# Altium PCB PCB_bad_traced.PcbDoc (part 1 of 5)
Units mm, origin at the board's own origin, x right, y up, seen from the top; angles counter-clockwise.
Board outline 425 x 295 mm, 2 copper layers (Top Layer, Bottom Layer); 484 components, 419 nets, 1569 pads, 847 vias.
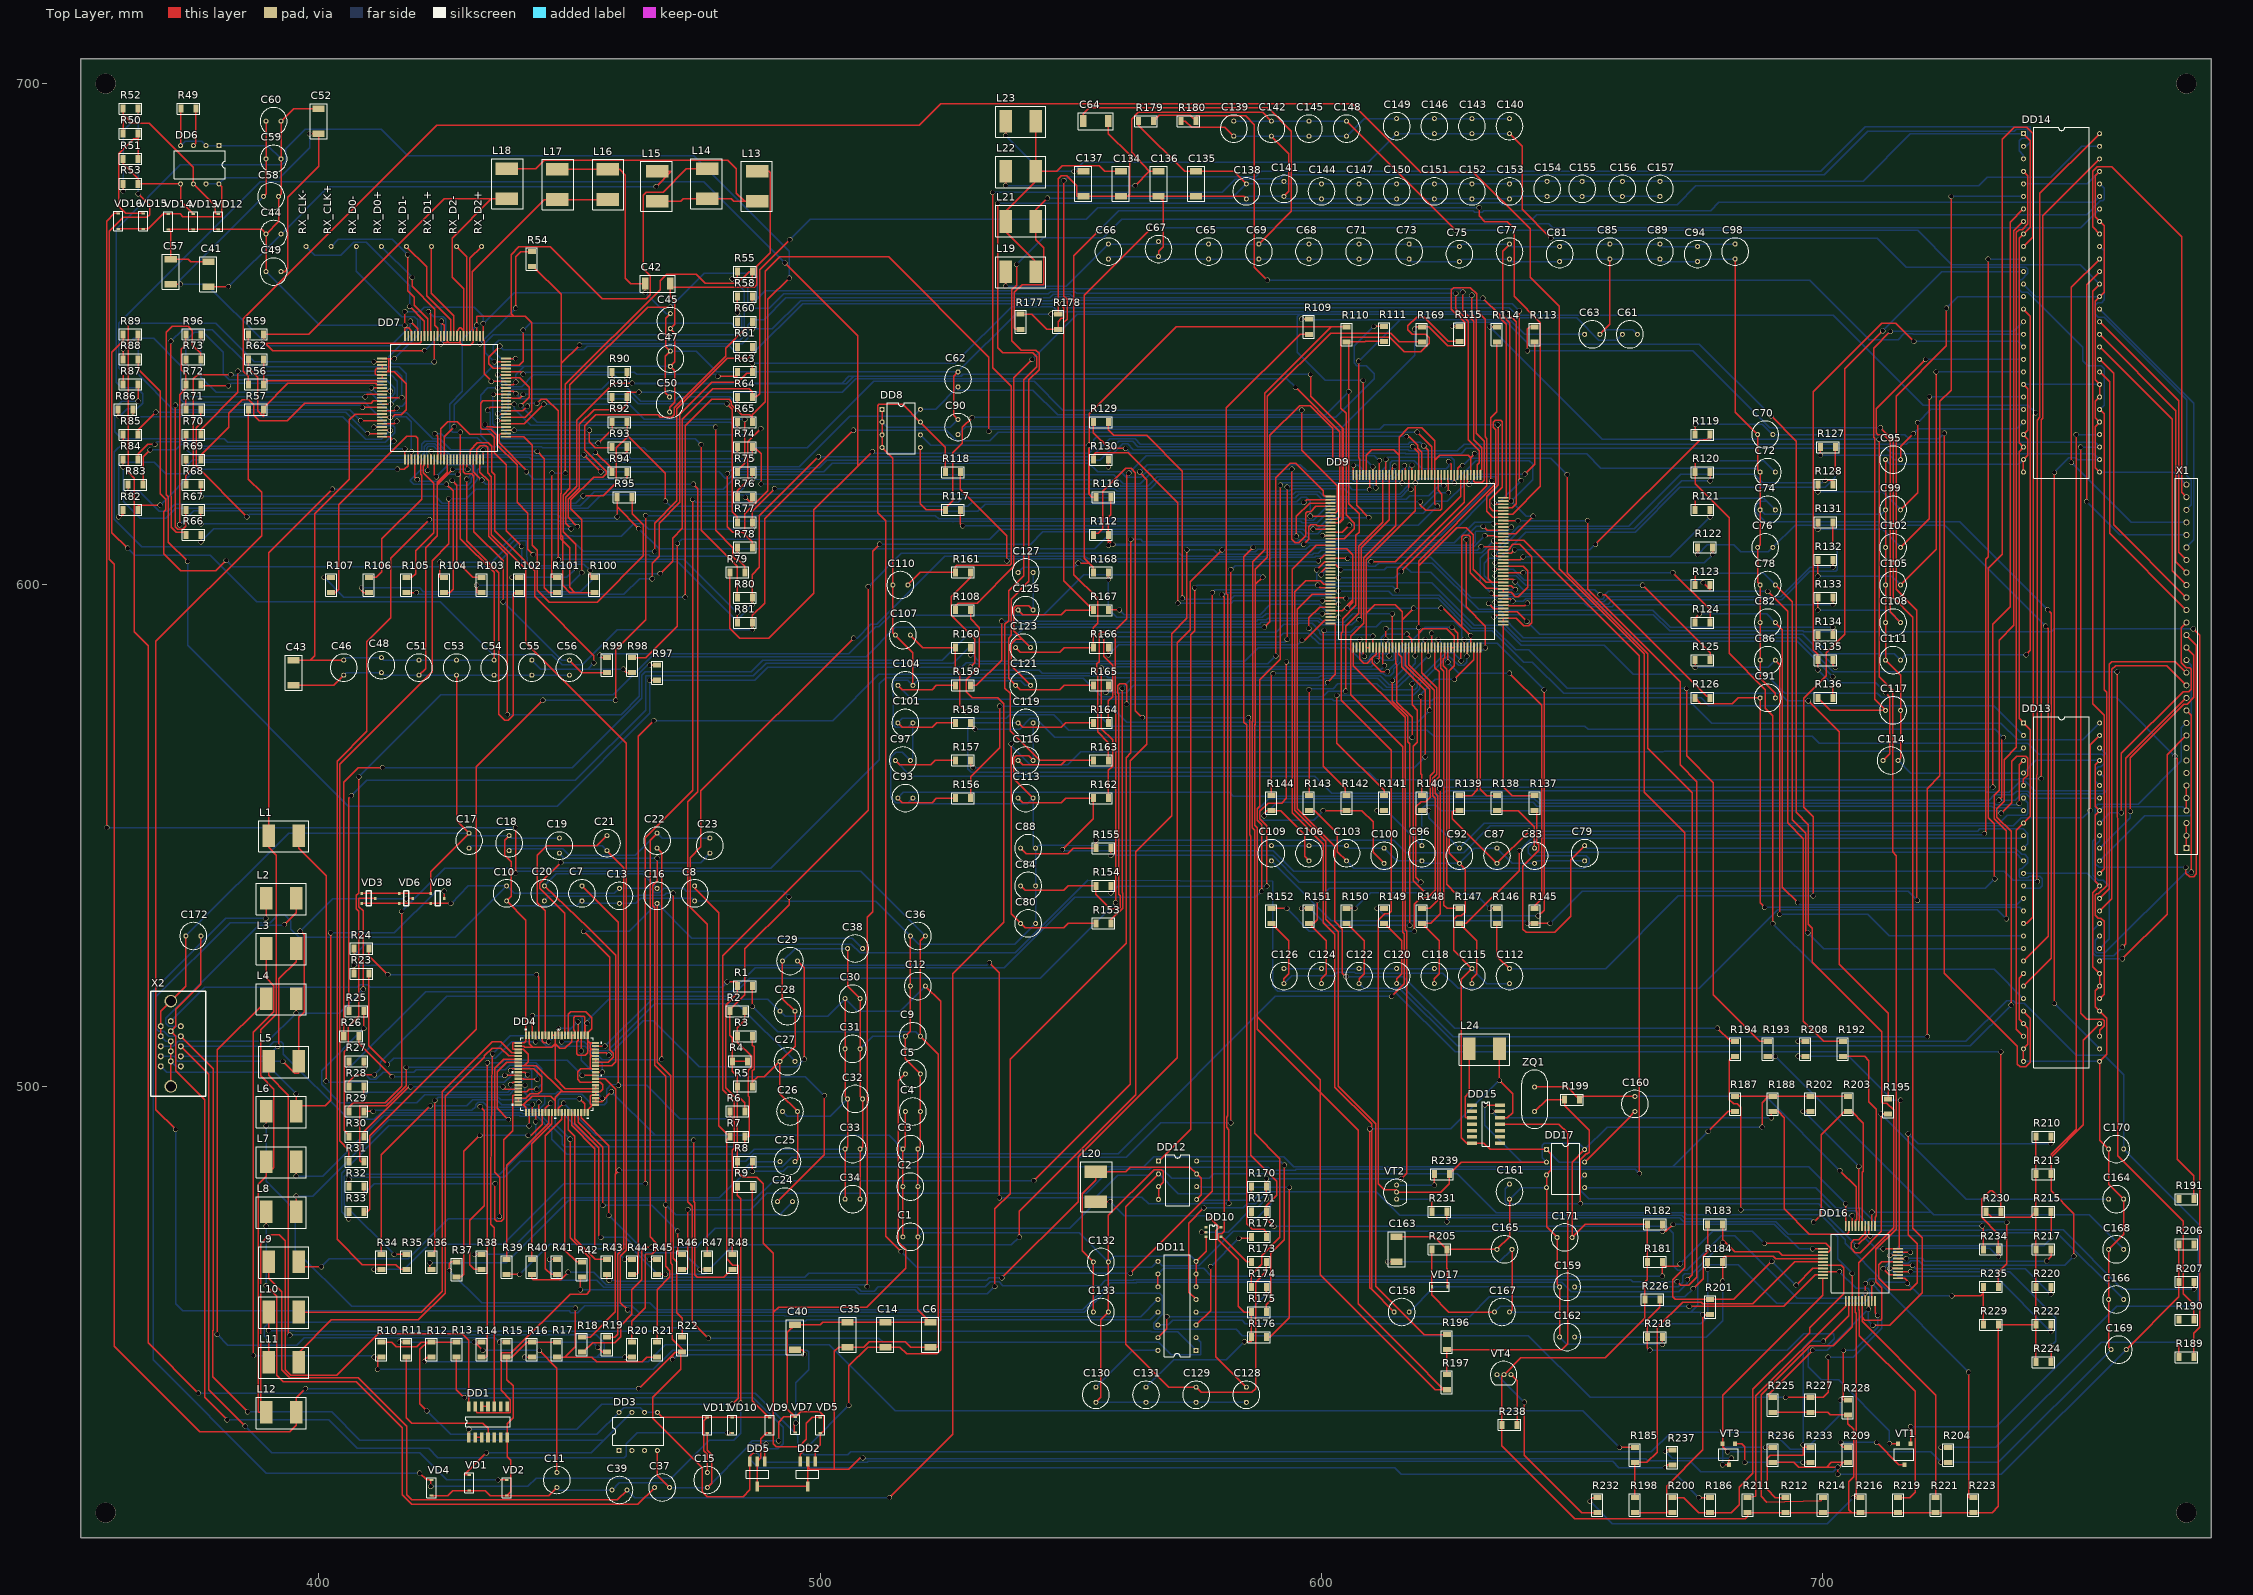
[diagram p0: Top Layer view]
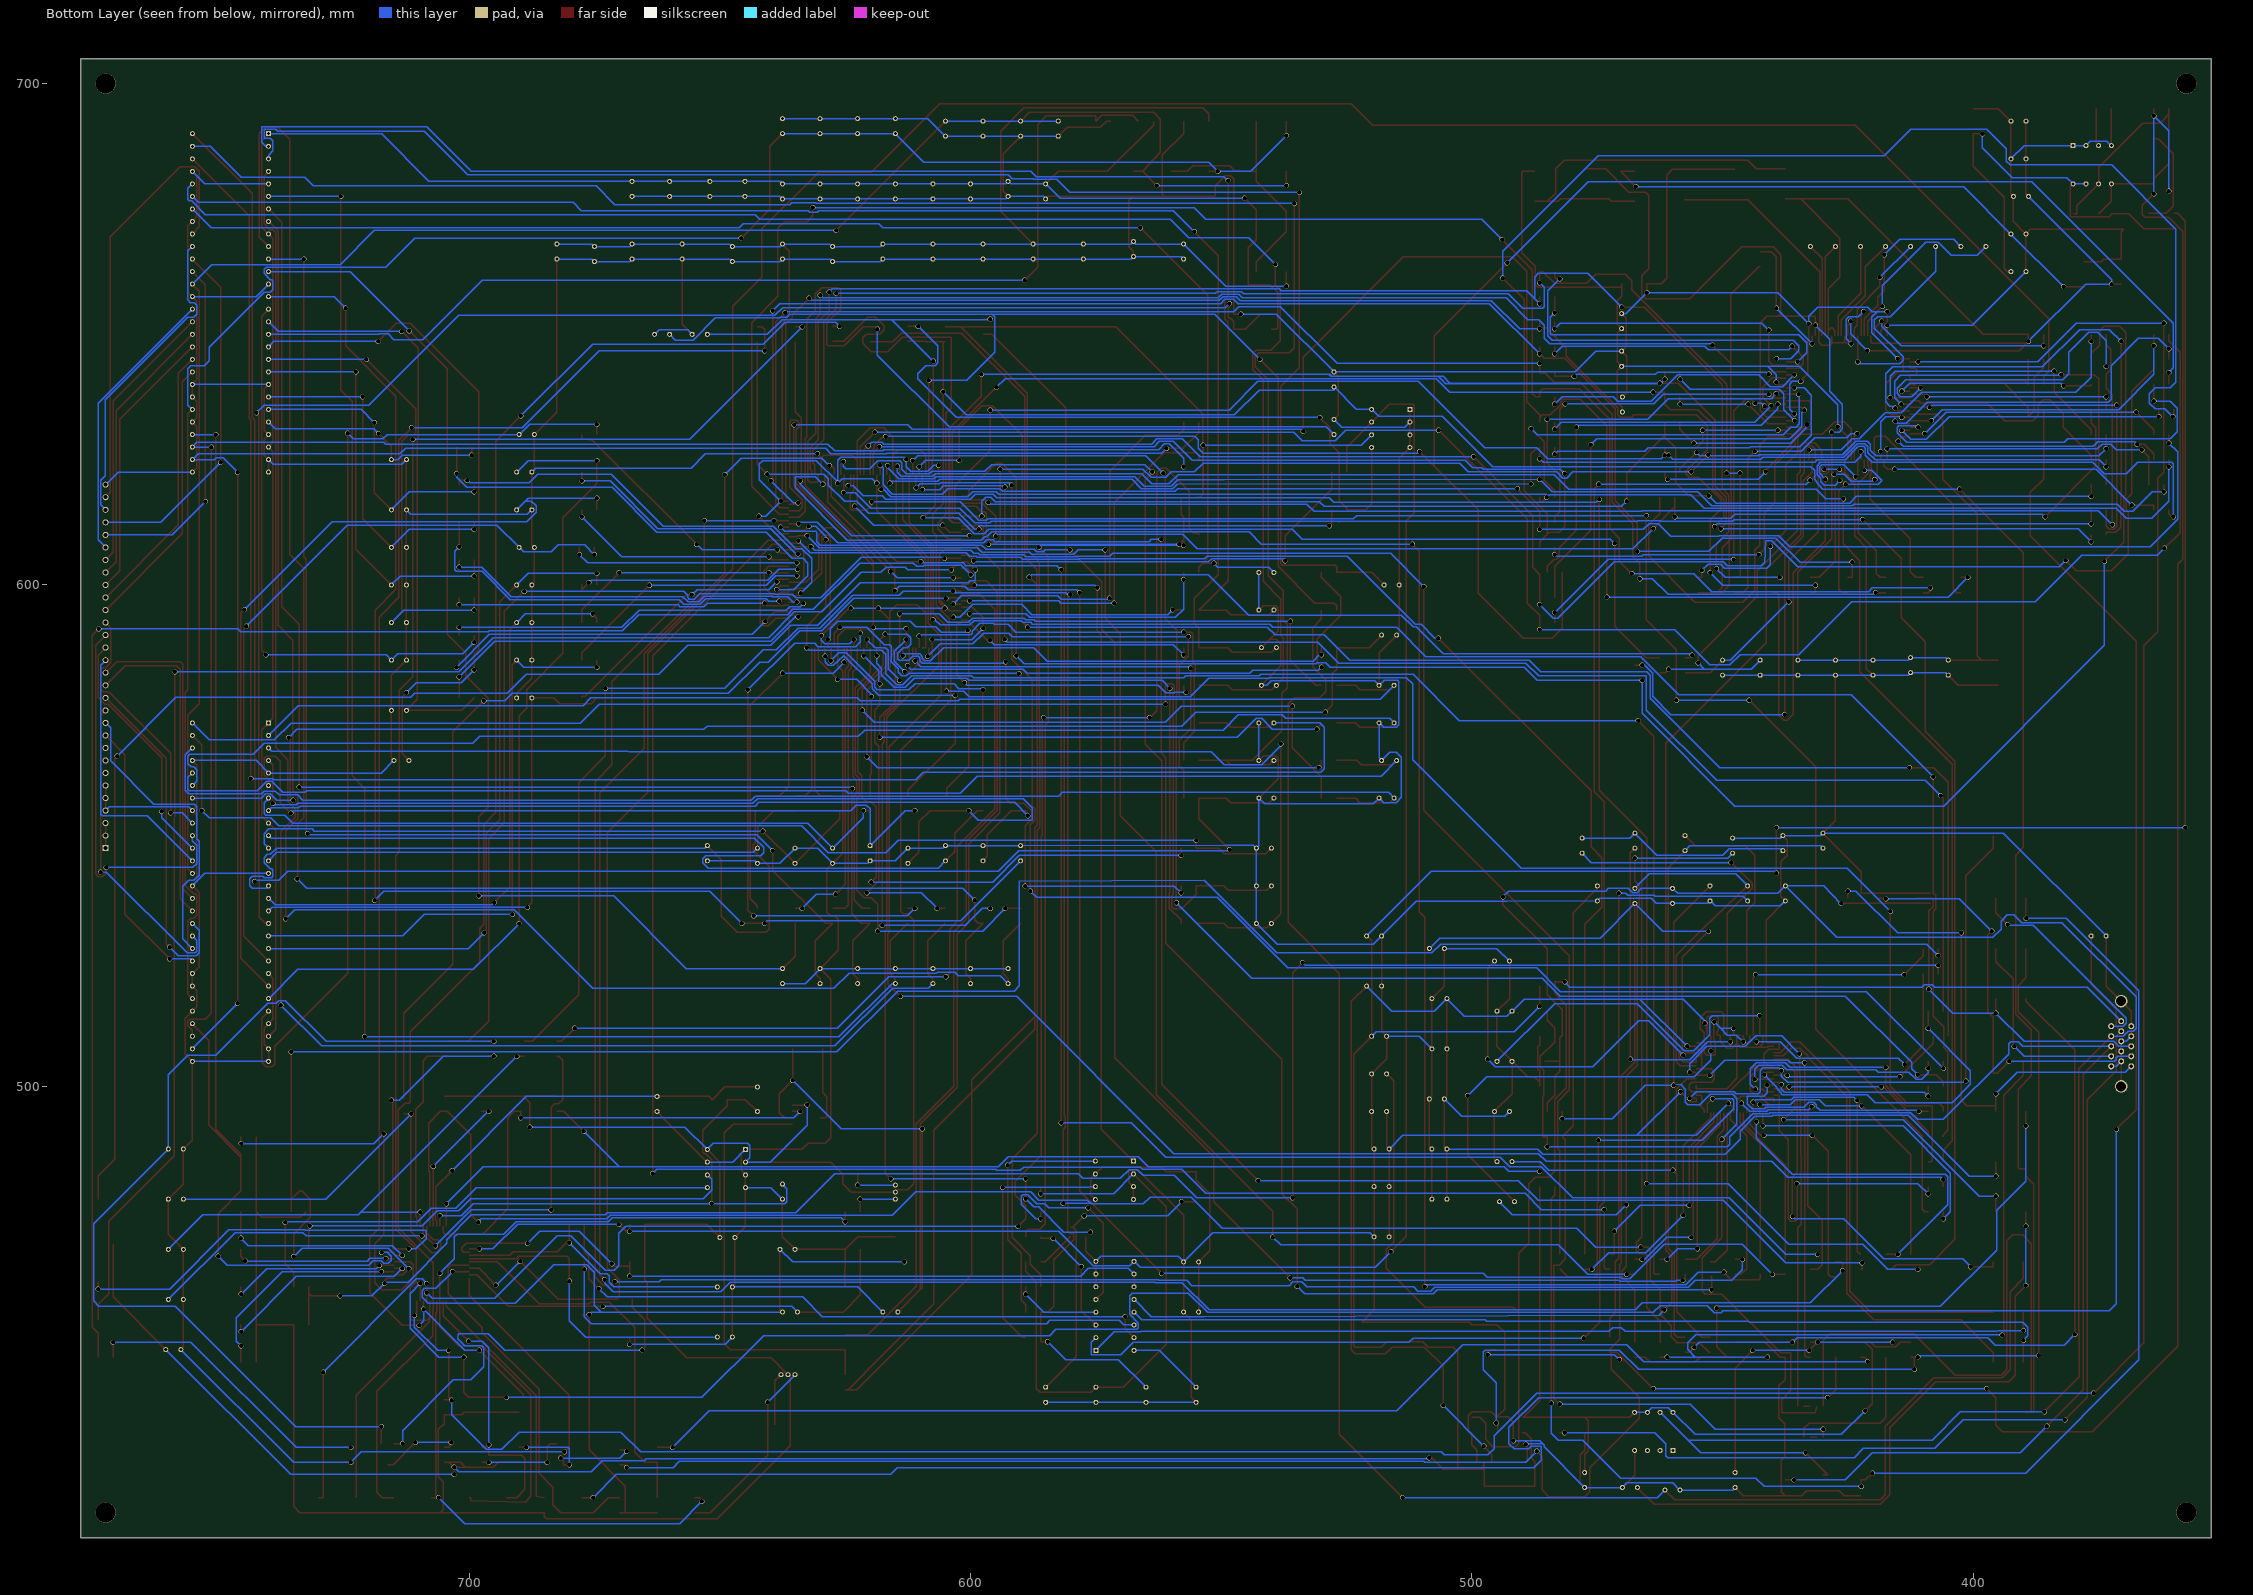
[diagram p1: Bottom Layer view, seen from below]

## Layer stack, top to bottom
Top Solder: solder mask 0.0102, Solder Resist, Dk 3.5
Top Layer: signal copper 0.0356
Dielectric 1: dielectric 0.32, FR-4, Dk 4.8
Bottom Layer: signal copper 0.0356
Bottom Solder: solder mask 0.0102, Solder Resist, Dk 3.5

## Board outline
352.5,410 777.5,410 777.5,705 352.5,705

## Design rules (kind name [scope] priority, off if disabled: settings)
Clearance [All] p1: gap=0.254 ignorepadtopadclearanceinfootprint=FALSE except(0: Arc-Hole Track-Hole SMDPad-Hole THPad-Hole Via-Hole Fill-Hole Poly-Hole Region-Hole Text-Hole; 0.2: Arc-SMDPad Track-SMDPad SMDPad-SMDPad)
PolygonConnect [All] p1: connectstyle=Relief reliefconductorwidth=0.254 reliefentries=4 polygonreliefangle="90 Angle" airgapwidth=0.254
RoutingVias [All] p1: holewidth=0.9 width=1 viastyle="Through Hole" minholewidth=0.6 minwidth=1 maxholewidth=1 maxwidth=1.2
SolderMaskExpansion [All] p1: expansion=0.102
Width [All] p1: maxlimit=0.3 minlimit=0.25 preferedwidth=0.25 minimp=50.000000 maximp=50.000000 favimp=50.000000
30 further rules are at their usual default settings.

## Classes and differential pairs
component class 31: C1 C2 C3 C4 C5 C6 C7 C8 C9 C10 C11 C12 C13 C14 C15 C16 C17 C18 C19 C20 C21 C22 C23 C24 C25 C26 C27 C28 C29 C30 C31 C32 C33 C34 C35 C36 C37 C38 C39 C40 DD1 DD2 DD3 DD4 DD5 L1 L2 L3 L4 L5 L6 L7 L8 L9 L10 L11 L12 R1 R2 R3 R4 R5 R6 R7 R8 R9 R10 R11 R12 R13 R14 R15 R16 R17 R18 R19 R20 R21 R22 R23 R24 R25 R26 R27 R28 R29 R30 R31 R32 R33 R34 R35 R36 R37 R38 R39 R40 R41 R42 R43 R44 R45 R46 R47 R48 VD1 VD2 VD3 VD4 VD5 VD6 VD7 VD8 VD9 VD10 VD11
component class 32: C41 C42 C43 C44 C45 C46 C47 C48 C49 C50 C51 C52 C53 C54 C55 C56 C57 C58 C59 C60 DD6 DD7 L13 L14 L15 L16 L17 L18 R49 R50 R51 R52 R53 R54 R55 R56 R57 R58 R59 R60 R61 R62 R63 R64 R65 R66 R67 R68 R69 R70 R71 R72 R73 R74 R75 R76 R77 R78 R79 R80 R81 R82 R83 R84 R85 R86 R87 R88 R89 R90 R91 R92 R93 R94 R95 R96 R97 R98 R99 R100 R101 R102 R103 R104 R105 R106 R107 RX_CLK+ RX_CLK- RX_D0+ RX_D0- RX_D1+ RX_D1- RX_D2+ RX_D2- VD12 VD13 VD14 VD15 VD16
component class 33: C61 C62 C63 C64 C65 C66 C67 C68 C69 C70 C71 C72 C73 C74 C75 C76 C77 C78 C79 C80 C81 C82 C83 C84 C85 C86 C87 C88 C89 C90 C91 C92 C93 C94 C95 C96 C97 C98 C99 C100 C101 C102 C103 C104 C105 C106 C107 C108 C109 C110 C111 C112 C113 C114 C115 C116 C117 C118 C119 C120 C121 C122 C123 C124 C125 C126 C127 DD8 DD9 L19 R108 R109 R110 R111 R112 R113 R114 R115 R116 R117 R118 R119 R120 R121 R122 R123 R124 R125 R126 R127 R128 R129 R130 R131 R132 R133 R134 R135 R136 R137 R138 R139 R140 R141 R142 R143 R144 R145 R146 R147 R148 R149 R150 R151 R152 R153 R154 R155 R156 R157 R158 R159 R160 R161 R162 R163 R164 R165 R166 R167 R168 R169
component class 34: C128 C129 C130 C131 C132 C133 DD10 DD11 DD12 L20 R170 R171 R172 R173 R174 R175 R176
component class 35: C134 C135 C136 C137 C138 C139 C140 C141 C142 C143 C144 C145 C146 C147 C148 C149 C150 C151 C152 C153 C154 C155 C156 C157 DD13 DD14 L21 L22 L23 R177 R178 R179 R180 X1
component class 36: C158 C159 C160 C161 C162 C163 C164 C165 C166 C167 C168 C169 C170 C171 DD15 DD16 DD17 L24 R181 R182 R183 R184 R185 R186 R187 R188 R189 R190 R191 R192 R193 R194 R195 R196 R197 R198 R199 R200 R201 R202 R203 R204 R205 R206 R207 R208 R209 R210 R211 R212 R213 R214 R215 R216 R217 R218 R219 R220 R221 R222 R223 R224 R225 R226 R227 R228 R229 R230 R231 R232 R233 R234 R235 R236 R237 R238 R239 VD17 VT1 VT2 VT3 VT4 ZQ1
component class VGA: C172 X2
net class B_INA[0..7]: B_INA0 B_INA1 B_INA2 B_INA3 B_INA4 B_INA5 B_INA6 B_INA7
net class B_INB[0..7]: B_INB0 B_INB1 B_INB2 B_INB3 B_INB4 B_INB5 B_INB6 B_INB7
net class G_INA[0..7]: G_INA0 G_INA1 G_INA2 G_INA3 G_INA4 G_INA5 G_INA6 G_INA7
net class G_INB[0..7]: G_INB0 G_INB1 G_INB2 G_INB3 G_INB4 G_INB5 G_INB6 G_INB7
net class R_INA[0..7]: R_INA0 R_INA1 R_INA2 R_INA3 R_INA4 R_INA5 R_INA6 R_INA7
net class R_INB[0..7]: R_INB0 R_INB1 R_INB2 R_INB3 R_INB4 R_INB5 R_INB6 R_INB7

## Components (designator, comment, footprint, x,y, rotation, side; value= is the part's Value field where it differs from the comment)
C1 "Capacitor" cap_electro_13 518,470 r0 top
C2 "Capacitor" cap_electro_13 518,480 r0 top
C3 "Capacitor" cap_electro_13 518,487.5 r0 top
C4 "Capacitor" cap_electro_13 518.5,495 r0 top
C5 "Capacitor" cap_electro_13 518.5,502.5 r0 top
C6 "TuningCapacitor" Cap_tantal_D 522,450.5 r270 top
C7 "Capacitor" cap_electro_13 452.5,538.5 r270 top
C8 "Capacitor" cap_electro_13 475,538.5 r270 top
C9 "Capacitor" cap_electro_13 518.5,510 r180 top
C10 "Capacitor" cap_electro_13 437.5,538.5 r270 top
C11 "Capacitor" cap_electro_13 447.5,421.5 r270 top
C12 "Capacitor" cap_electro_13 519.5,520 r180 top
C13 "Capacitor" cap_electro_13 460,538 r270 top
C14 "TuningCapacitor" Cap_tantal_D 513,450.5 r270 top
C15 "Capacitor" cap_electro_13 477.5,421.5 r270 top
C16 "Capacitor" cap_electro_13 467.5,538 r270 top
C17 "Capacitor" cap_electro_13 430,549 r90 top
C18 "Capacitor" cap_electro_13 438,548.5 r90 top
C19 "Capacitor" cap_electro_13 448,548 r90 top
C20 "Capacitor" cap_electro_13 445,538.5 r270 top
C21 "Capacitor" cap_electro_13 457.5,548.5 r270 top
C22 "Capacitor" cap_electro_13 467.5,549 r90 top
C23 "Capacitor" cap_electro_13 478,548 r90 top
C24 "Capacitor" cap_electro_13 493,477 r0 top
C25 "Capacitor" cap_electro_13 493.5,485 r180 top
C26 "Capacitor" cap_electro_13 494,495 r0 top
C27 "Capacitor" cap_electro_13 493.5,505 r0 top
C28 "Capacitor" cap_electro_13 493.5,515 r0 top
C29 "Capacitor" cap_electro_13 494,525 r0 top
C30 "Capacitor" cap_electro_13 506.5,517.5 r0 top
C31 "Capacitor" cap_electro_13 506.5,507.5 r0 top
C32 "Capacitor" cap_electro_13 507,497.5 r0 top
C33 "Capacitor" cap_electro_13 506.5,487.5 r0 top
C34 "Capacitor" cap_electro_13 506.5,477.5 r0 top
C35 "TuningCapacitor" Cap_tantal_D 505.5,450.5 r270 top
C36 "Capacitor" cap_electro_13 519.5,530 r180 top
C37 "Capacitor" cap_electro_13 468.5,420 r0 top
C38 "Capacitor" cap_electro_13 507,527.5 r180 top
C39 "Capacitor" cap_electro_13 460,419.5 r180 top
C40 "TuningCapacitor" Cap_tantal_D 495,450 r270 top
C41 "TuningCapacitor" Cap_tantal_D 378,662 r270 top
C42 "TuningCapacitor" Cap_tantal_D 467.62,660.12 r0 top
C43 "TuningCapacitor" Cap_tantal_D 395,582.5 r90 top
C44 "Capacitor" cap_electro_13 391,670 r0 top
C45 "Capacitor" cap_electro_13 470.12,652.62 r270 top
C46 "Capacitor" cap_electro_13 405,583.5 r90 top
C47 "Capacitor" cap_electro_13 470.12,645.12 r270 top
C48 "Capacitor" cap_electro_13 412.5,584 r90 top
C49 "Capacitor" cap_electro_13 391,662.5 r0 top
C50 "Capacitor" cap_electro_13 470,636 r270 top
C51 "Capacitor" cap_electro_13 420,583.5 r90 top
C52 "TuningCapacitor" Cap_tantal_D 400,692.5 r270 top
C53 "Capacitor" cap_electro_13 427.5,583.5 r90 top
C54 "Capacitor" cap_electro_13 435,583.5 r90 top
C55 "Capacitor" cap_electro_13 442.5,583.5 r90 top
C56 "Capacitor" cap_electro_13 450,583.5 r90 top
C57 "TuningCapacitor" Cap_tantal_D 370.5,662.5 r270 top
C58 "Capacitor" cap_electro_13 390.5,677.5 r180 top
C59 "Capacitor" cap_electro_13 391,685 r180 top
C60 "Capacitor" cap_electro_13 391,692.5 r180 top
C61 "Capacitor" cap_electro_13 661.5,650 r180 top
C62 "Capacitor" cap_electro_13 527.5,641 r270 top
C63 "Capacitor" cap_electro_13 654,650 r180 top
C64 "TuningCapacitor" Cap_tantal_D 555,692.5 r180 top
C65 "Capacitor" cap_electro_13 577.5,666.5 r90 top
C66 "Capacitor" cap_electro_13 557.5,666.5 r90 top
C67 "Capacitor" cap_electro_13 567.5,667 r90 top
C68 "Capacitor" cap_electro_13 597.5,666.5 r90 top
C69 "Capacitor" cap_electro_13 587.5,666.5 r90 top
C70 "Capacitor" cap_electro_13 688.5,630 r0 top
C71 "Capacitor" cap_electro_13 607.5,666.5 r90 top
C72 "Capacitor" cap_electro_13 689,622.5 r0 top
C73 "Capacitor" cap_electro_13 617.5,666.5 r90 top
C74 "Capacitor" cap_electro_13 689,615 r0 top
C75 "Capacitor" cap_electro_13 627.5,666 r90 top
C76 "Capacitor" cap_electro_13 688.5,607.5 r0 top
C77 "Capacitor" cap_electro_13 637.5,666.5 r90 top
C78 "Capacitor" cap_electro_13 689,600 r0 top
C79 "Capacitor" cap_electro_13 652.5,546.5 r90 top
C80 "Capacitor" cap_electro_13 541.5,532.5 r180 top
C81 "Capacitor" cap_electro_13 647.5,666 r90 top
C82 "Capacitor" cap_electro_13 689,592.5 r0 top
C83 "Capacitor" cap_electro_13 642.5,546 r90 top
C84 "Capacitor" cap_electro_13 541.5,540 r180 top
C85 "Capacitor" cap_electro_13 657.5,666.5 r90 top
C86 "Capacitor" cap_electro_13 689,585 r0 top
C87 "Capacitor" cap_electro_13 635,546 r270 top
C88 "Capacitor" cap_electro_13 541.5,547.5 r180 top
C89 "Capacitor" cap_electro_13 667.5,666.5 r90 top
C90 "Capacitor" cap_electro_13 527.5,631.5 r270 top
C91 "Capacitor" cap_electro_13 689,577.5 r180 top
C92 "Capacitor" cap_electro_13 627.5,546 r90 top
C93 "Capacitor" cap_electro_13 517,557.5 r180 top
C94 "Capacitor" cap_electro_13 675,666 r90 top
C95 "Capacitor" cap_electro_13 714,625 r0 top
C96 "Capacitor" cap_electro_13 620,546.5 r90 top
C97 "Capacitor" cap_electro_13 516.5,565 r180 top
C98 "Capacitor" cap_electro_13 682.5,666.5 r90 top
C99 "Capacitor" cap_electro_13 714,615 r0 top
C100 "Capacitor" cap_electro_13 612.5,546 r270 top
C101 "Capacitor" cap_electro_13 517,572.5 r180 top
C102 "Capacitor" cap_electro_13 714,607.5 r0 top
C103 "Capacitor" cap_electro_13 605,546.5 r270 top
C104 "Capacitor" cap_electro_13 517,580 r180 top
C105 "Capacitor" cap_electro_13 714,600 r0 top
C106 "Capacitor" cap_electro_13 597.5,546.5 r270 top
C107 "Capacitor" cap_electro_13 516.5,590 r0 top
C108 "Capacitor" cap_electro_13 714,592.5 r0 top
C109 "Capacitor" cap_electro_13 590,546.5 r270 top
C110 "Capacitor" cap_electro_13 516,600 r0 top
C111 "Capacitor" cap_electro_13 714,585 r0 top
C112 "Capacitor" cap_electro_13 637.5,522 r90 top
C113 "Capacitor" cap_electro_13 541,557.5 r180 top
C114 "Capacitor" cap_electro_13 713.5,565 r180 top
C115 "Capacitor" cap_electro_13 630,522 r270 top
C116 "Capacitor" cap_electro_13 541,565 r180 top
C117 "Capacitor" cap_electro_13 714,575 r180 top
C118 "Capacitor" cap_electro_13 622.5,522 r270 top
C119 "Capacitor" cap_electro_13 541,572.5 r180 top
C120 "Capacitor" cap_electro_13 615,522 r270 top
C121 "Capacitor" cap_electro_13 540.5,580 r180 top
C122 "Capacitor" cap_electro_13 607.5,522 r270 top
C123 "Capacitor" cap_electro_13 540.5,587.5 r180 top
C124 "Capacitor" cap_electro_13 600,522 r270 top
C125 "Capacitor" cap_electro_13 541,595 r180 top
C126 "Capacitor" cap_electro_13 592.5,522 r270 top
C127 "Capacitor" cap_electro_13 541,602.5 r180 top
C128 "Capacitor" cap_electro_13 585,438.5 r270 top
C129 "Capacitor" cap_electro_13 575,438.5 r270 top
C130 "Capacitor" cap_electro_13 555,438.5 r90 top
C131 "Capacitor" cap_electro_13 565,438.5 r270 top
C132 "Capacitor" cap_electro_13 556,465 r0 top
C133 "Capacitor" cap_electro_13 556,455 r0 top
C134 "TuningCapacitor" Cap_tantal_D 560,680 r90 top
C135 "TuningCapacitor" Cap_tantal_D 575,680 r90 top
C136 "TuningCapacitor" Cap_tantal_D 567.5,680 r90 top
C137 "TuningCapacitor" Cap_tantal_D 552.5,680 r90 top
C138 "Capacitor" cap_electro_13 585,678.5 r90 top
C139 "Capacitor" cap_electro_13 582.5,691 r90 top
C140 "Capacitor" cap_electro_13 637.5,691.5 r270 top
C141 "Capacitor" cap_electro_13 592.5,679 r90 top
C142 "Capacitor" cap_electro_13 590,691 r90 top
C143 "Capacitor" cap_electro_13 630,691.5 r270 top
C144 "Capacitor" cap_electro_13 600,678.5 r90 top
C145 "Capacitor" cap_electro_13 597.5,691 r90 top
C146 "Capacitor" cap_electro_13 622.5,691.5 r270 top
C147 "Capacitor" cap_electro_13 607.5,678.5 r90 top
C148 "Capacitor" cap_electro_13 605,691 r90 top
C149 "Capacitor" cap_electro_13 615,691.5 r270 top
C150 "Capacitor" cap_electro_13 615,678.5 r90 top
C151 "Capacitor" cap_electro_13 622.5,678.5 r90 top
C152 "Capacitor" cap_electro_13 630,678.5 r90 top
C153 "Capacitor" cap_electro_13 637.5,678.5 r90 top
C154 "Capacitor" cap_electro_13 645,679 r90 top
C155 "Capacitor" cap_electro_13 652,679 r90 top
C156 "Capacitor" cap_electro_13 660,679 r90 top
C157 "Capacitor" cap_electro_13 667.5,679 r90 top
C158 "Capacitor" cap_electro_13 616,455 r0 top
C159 "Capacitor" cap_electro_13 649,460 r0 top
C160 "Capacitor" cap_electro_13 662.5,496.5 r270 top
C161 "Capacitor" cap_electro_13 637.5,479 r270 top
C162 "Capacitor" cap_electro_13 649,450 r0 top
C163 "TuningCapacitor" Cap_tantal_D 615,467.5 r270 top
C164 "Capacitor" cap_electro_13 758.5,477.5 r0 top
C165 "Capacitor" cap_electro_13 636.5,467.5 r0 top
C166 "Capacitor" cap_electro_13 758.5,457.5 r180 top
C167 "Capacitor" cap_electro_13 636,455 r0 top
C168 "Capacitor" cap_electro_13 758.5,467.5 r180 top
C169 "Capacitor" cap_electro_13 759,447.5 r180 top
C170 "Capacitor" cap_electro_13 758.5,487.5 r180 top
C171 "Capacitor" cap_electro_13 648.5,469.88 r180 top
C172 "Capacitor" cap_electro_13 375,530 r0 top
DD1 "74LVX14" 74LVX14(SO-14) 429.96,430.085 r90 top
DD2 "AIC1732" AIC1732(SOT-89) 497.5,422.5 r270 top
DD3 "24C21" 24Cxx 459.92,427.38 r90 top
DD4 "AD9883ABSTZ-140" ST_80_2_ADI 447.5,502.5 r90 top
DD5 "AIC1732" AIC1732(SOT-89) 487.5,422.5 r270 top
DD6 "24C02" 24Cxx 380.08,687.62 r270 top
DD7 "SIL151" SIL151 412.65,645.15 r180 top
DD8 "24LC08" 24Cxx 512.38,635.04 r0 top
DD9 "SD1210" SD1210 601.8,617.65 r0 top
DD10 "F14-SINGLE" 74AHC1G14(SOT25) 577,471.9 r0 top
DD11 "74LV4053" 74LV4053(SOT38-4) 575,447.34 r180 top
DD12 "AV9173-01" AV9173-01(DIP8) 567.5,485.08 r0 top
DD13 "SN75LVDS83" SN75LVDS83_v2 740,572.5 r0 top
DD14 "SN75LVDS83" SN75LVDS83_v2 740,690 r0 top
DD15 "74LCX125" 74LCX125(page12) 630,496.27 r0 top
DD16 "SM0230" SM0230 710.4,471.4 r90 top
DD17 "24LC16" 24Cxx 644.88,487.42 r0 top
L1 "Inductor" inductor 393,550 r180 top
L2 "Inductor" inductor 392.5,537.5 r180 top
L3 "Inductor" inductor 392.5,527.5 r180 top
L4 "Inductor" inductor 392.5,517.5 r180 top
L5 "Inductor" inductor 393,505 r180 top
L6 "Inductor" inductor 392.5,495 r180 top
L7 "Inductor" inductor 392.5,485 r180 top
L8 "Inductor" inductor 392.5,475 r180 top
L9 "Inductor" inductor 393,465 r180 top
L10 "Inductor" inductor 393,455 r180 top
L11 "Inductor" inductor 393,445 r180 top
L12 "Inductor" inductor 392.5,435 r180 top
L13 "Inductor" inductor 487.5,679.5 r90 top
L14 "Inductor" inductor 477.5,680 r90 top
L15 "Inductor" inductor 467.5,679.5 r90 top
L16 "Inductor" inductor 457.62,679.88 r270 top
L17 "Inductor" inductor 447.62,679.88 r270 top
L18 "Inductor" inductor 437.5,680 r270 top
L19 "Inductor" inductor 540,662.5 r180 top
L20 "Inductor" inductor 555,480 r270 top
L21 "Inductor" inductor 540,672.5 r0 top
L22 "Inductor" inductor 540,682.5 r180 top
L23 "Inductor" inductor 540,692.5 r180 top
L24 "Inductor" inductor 632.5,507.5 r180 top
R1 "Resistor" R_1206 485,520 r0 top
R2 "Resistor" R_1206 483.5,515 r180 top
R3 "Resistor" R_1206 485,510 r180 top
R4 "Resistor" R_1206 484,505 r180 top
R5 "Resistor" R_1206 485,500 r180 top
R6 "Resistor" R_1206 483.5,495 r180 top
R7 "Resistor" R_1206 483.5,490 r180 top
R8 "Resistor" R_1206 485,485 r0 top
R9 "Resistor" R_1206 485,480 r0 top
R10 "Resistor" R_1206 412.5,447.5 r90 top
R11 "Resistor" R_1206 417.5,447.5 r90 top
R12 "Resistor" R_1206 422.5,447.5 r90 top
R13 "Resistor" R_1206 427.5,447.5 r90 top
R14 "Resistor" R_1206 432.5,447.5 r270 top
R15 "Resistor" R_1206 437.5,447.5 r90 top
R16 "Resistor" R_1206 442.5,447.5 r270 top
R17 "Resistor" R_1206 447.5,447.5 r270 top
R18 "Resistor" R_1206 452.5,448.5 r90 top
R19 "Resistor" R_1206 457.5,448.5 r90 top
R20 "Resistor" R_1206 462.5,447.5 r90 top
R21 "Resistor" R_1206 467.5,447.5 r90 top
R22 "Resistor" R_1206 472.5,448.5 r90 top
R23 "Resistor" R_1206 408.5,522.5 r0 top
R24 "Resistor" R_1206 408.5,527.5 r0 top
R25 "Resistor" R_1206 407.5,515 r180 top
R26 "Resistor" R_1206 406.5,510 r180 top
R27 "Resistor" R_1206 407.5,505 r180 top
R28 "Resistor" R_1206 407.5,500 r180 top
R29 "Resistor" R_1206 407.5,495 r180 top
R30 "Resistor" R_1206 407.5,490 r180 top
R31 "Resistor" R_1206 407.5,485 r180 top
R32 "Resistor" R_1206 407.5,480 r180 top
R33 "Resistor" R_1206 407.5,475 r0 top
R34 "Resistor" R_1206 412.5,465 r270 top
R35 "Resistor" R_1206 417.5,465 r270 top
R36 "Resistor" R_1206 422.5,465 r270 top
R37 "Resistor" R_1206 427.5,463.5 r90 top
R38 "Resistor" R_1206 432.5,465 r90 top
R39 "Resistor" R_1206 437.5,464 r270 top
R40 "Resistor" R_1206 442.5,464 r270 top
R41 "Resistor" R_1206 447.5,464 r90 top
R42 "Resistor" R_1206 452.5,463.5 r270 top
R43 "Resistor" R_1206 457.5,464 r270 top
R44 "Resistor" R_1206 462.5,464 r270 top
R45 "Resistor" R_1206 467.5,464 r270 top
R46 "Resistor" R_1206 472.5,465 r270 top
R47 "Resistor" R_1206 477.5,465 r90 top
R48 "Resistor" R_1206 482.5,465 r90 top
R49 "Resistor" R_1206 374,695 r0 top
R50 "Resistor" R_1206 362.5,690 r0 top
R51 "Resistor" R_1206 362.5,685 r0 top
R52 "Resistor" R_1206 362.5,695 r180 top
R53 "Resistor" R_1206 362.5,680 r0 top
R54 "Resistor" R_1206 442.5,665 r270 top
R55 "Resistor" R_1206 485,662.5 r0 top
R56 "Resistor" R_1206 387.5,640 r180 top
R57 "Resistor" R_1206 387.5,635 r180 top
R58 "Resistor" R_1206 485,657.5 r0 top
R59 "Resistor" R_1206 387.5,650 r180 top
R60 "Resistor" R_1206 485,652.5 r0 top
R61 "Resistor" R_1206 485,647.5 r0 top
R62 "Resistor" R_1206 387.5,645 r0 top
R63 "Resistor" R_1206 485,642.5 r0 top
R64 "Resistor" R_1206 485,637.5 r0 top
R65 "Resistor" R_1206 485,632.5 r0 top
R66 "Resistor" R_1206 375,610 r0 top
R67 "Resistor" R_1206 375,615 r0 top
R68 "Resistor" R_1206 375,620 r0 top
R69 "Resistor" R_1206 375,625 r180 top
R70 "Resistor" R_1206 375,630 r180 top
R71 "Resistor" R_1206 375,635 r0 top
R72 "Resistor" R_1206 375,640 r180 top
R73 "Resistor" R_1206 375,645 r0 top
R74 "Resistor" R_1206 485,627.5 r0 top
R75 "Resistor" R_1206 485,622.5 r0 top
R76 "Resistor" R_1206 485,617.5 r0 top
R77 "Resistor" R_1206 485,612.5 r0 top
R78 "Resistor" R_1206 485,607.5 r0 top
R79 "Resistor" R_1206 483.5,602.5 r180 top
R80 "Resistor" R_1206 485,597.5 r0 top
R81 "Resistor" R_1206 485,592.5 r0 top
R82 "Resistor" R_1206 362.5,615 r180 top
R83 "Resistor" R_1206 363.5,620 r180 top
R84 "Resistor" R_1206 362.5,625 r180 top
R85 "Resistor" R_1206 362.5,630 r180 top
R86 "Resistor" R_1206 361.5,635 r180 top
R87 "Resistor" R_1206 362.5,640 r180 top
R88 "Resistor" R_1206 362.5,645 r0 top
R89 "Resistor" R_1206 362.5,650 r180 top
R90 "Resistor" R_1206 460,642.5 r0 top
R91 "Resistor" R_1206 460,637.5 r0 top
R92 "Resistor" R_1206 460,632.5 r0 top
R93 "Resistor" R_1206 460,627.5 r0 top
R94 "Resistor" R_1206 460,622.5 r180 top
R95 "Resistor" R_1206 461,617.5 r180 top
R96 "Resistor" R_1206 375,650 r180 top
R97 "Resistor" R_1206 467.5,582.5 r270 top
R98 "Resistor" R_1206 462.5,584 r90 top
R99 "Resistor" R_1206 457.5,584 r90 top
R100 "Resistor" R_1206 455,600 r270 top
R101 "Resistor" R_1206 447.5,600 r90 top
R102 "Resistor" R_1206 440,600 r90 top
R103 "Resistor" R_1206 432.5,600 r270 top
R104 "Resistor" R_1206 425,600 r90 top
R105 "Resistor" R_1206 417.5,600 r270 top
R106 "Resistor" R_1206 410,600 r270 top
R107 "Resistor" R_1206 402.5,600 r90 top
R108 "Resistor" R_1206 528.5,595 r0 top
R109 "Resistor" R_1206 597.5,651.5 r270 top
R110 "Resistor" R_1206 605,650 r90 top
R111 "Resistor" R_1206 612.5,650.08 r90 top
R112 "Resistor" R_1206 556,610 r180 top
R113 "Resistor" R_1206 642.5,650 r90 top
R114 "Resistor" R_1206 635,650 r90 top
R115 "Resistor" R_1206 627.5,650.08 r90 top
R116 "Resistor" R_1206 556.5,617.5 r180 top
R117 "Resistor" R_1206 526.5,615 r180 top
R118 "Resistor" R_1206 526.5,622.5 r180 top
R119 "Resistor" R_1206 676,630 r0 top
R120 "Resistor" R_1206 676,622.5 r0 top
R121 "Resistor" R_1206 676,615 r0 top
R122 "Resistor" R_1206 676.5,607.5 r0 top
R123 "Resistor" R_1206 676,600 r0 top
R124 "Resistor" R_1206 676,592.5 r0 top
R125 "Resistor" R_1206 676,585 r0 top
R126 "Resistor" R_1206 676,577.5 r0 top
R127 "Resistor" R_1206 701,627.5 r0 top
R128 "Resistor" R_1206 700.5,620 r0 top
R129 "Resistor" R_1206 556,632.5 r0 top
R130 "Resistor" R_1206 556,625 r180 top
R131 "Resistor" R_1206 700.5,612.5 r0 top
R132 "Resistor" R_1206 700.5,605 r0 top
R133 "Resistor" R_1206 700.5,597.5 r0 top
R134 "Resistor" R_1206 700.5,590 r0 top
R135 "Resistor" R_1206 700.5,585 r0 top
R136 "Resistor" R_1206 700.5,577.5 r0 top
R137 "Resistor" R_1206 642.5,556.5 r90 top
R138 "Resistor" R_1206 635,556.5 r90 top
R139 "Resistor" R_1206 627.5,556.5 r90 top
R140 "Resistor" R_1206 620,556.5 r90 top
R141 "Resistor" R_1206 612.5,556.5 r90 top
R142 "Resistor" R_1206 605,556.5 r90 top
R143 "Resistor" R_1206 597.5,556.5 r90 top
R144 "Resistor" R_1206 590,556.5 r90 top
R145 "Resistor" R_1206 642.5,534 r90 top
R146 "Resistor" R_1206 635,534 r90 top
R147 "Resistor" R_1206 627.5,534 r90 top
R148 "Resistor" R_1206 620,534 r90 top
R149 "Resistor" R_1206 612.5,534 r90 top
R150 "Resistor" R_1206 605,534 r90 top
R151 "Resistor" R_1206 597.5,534 r90 top
R152 "Resistor" R_1206 590,534 r90 top
R153 "Resistor" R_1206 556.5,532.5 r0 top
R154 "Resistor" R_1206 556.5,540 r0 top
R155 "Resistor" R_1206 556.5,547.5 r0 top
R156 "Resistor" R_1206 528.5,557.5 r0 top
R157 "Resistor" R_1206 528.5,565 r0 top
R158 "Resistor" R_1206 528.5,572.5 r0 top
R159 "Resistor" R_1206 528.5,580 r0 top
R160 "Resistor" R_1206 528.5,587.5 r0 top
R161 "Resistor" R_1206 528.5,602.5 r0 top
R162 "Resistor" R_1206 556,557.5 r0 top
R163 "Resistor" R_1206 556,565 r0 top
R164 "Resistor" R_1206 556,572.5 r0 top
R165 "Resistor" R_1206 556,580 r0 top
R166 "Resistor" R_1206 556,587.5 r0 top
R167 "Resistor" R_1206 556,595 r0 top
R168 "Resistor" R_1206 556,602.5 r0 top
R169 "Resistor" R_1206 620,650 r90 top
R170 "Resistor" R_1206 587.5,480 r180 top
R171 "Resistor" R_1206 587.5,475 r180 top
R172 "Resistor" R_1206 587.5,470 r180 top
R173 "Resistor" R_1206 587.5,465 r0 top
R174 "Resistor" R_1206 587.5,460 r180 top
R175 "Resistor" R_1206 587.5,455 r180 top
R176 "Resistor" R_1206 587.5,450 r180 top
R177 "Resistor" R_1206 540,652.5 r270 top
R178 "Resistor" R_1206 547.5,652.5 r270 top
R179 "Resistor" R_1206 565,692.5 r180 top
R180 "Resistor" R_1206 573.5,692.5 r0 top
R181 "Resistor" R_1206 666.5,465 r180 top
R182 "Resistor" R_1206 666.5,472.5 r180 top
R183 "Resistor" R_1206 678.5,472.5 r0 top
R184 "Resistor" R_1206 678.5,465 r0 top
R185 "Resistor" R_1206 662.5,426.5 r270 top
R186 "Resistor" R_1206 677.5,416.5 r270 top
R187 "Resistor" R_1206 682.5,496.5 r90 top
R188 "Resistor" R_1206 690,496.5 r90 top
R189 "Resistor" R_1206 772.5,446 r0 top
R190 "Resistor" R_1206 772.5,453.5 r0 top
R191 "Resistor" R_1206 772.5,477.5 r0 top
R192 "Resistor" R_1206 704,507.5 r90 top
R193 "Resistor" R_1206 689,507.5 r90 top
R194 "Resistor" R_1206 682.5,507.5 r90 top
R195 "Resistor" R_1206 713,496 r90 top
R196 "Resistor" R_1206 625,449 r90 top
R197 "Resistor" R_1206 625,441 r270 top
R198 "Resistor" R_1206 662.5,416.5 r90 top
R199 "Resistor" R_1206 650,497.38 r0 top
R200 "Resistor" R_1206 670,416.5 r90 top
R201 "Resistor" R_1206 677.5,456 r90 top
R202 "Resistor" R_1206 697.5,496.5 r90 top
R203 "Resistor" R_1206 705,496.5 r90 top
R204 "Resistor" R_1206 725,426.5 r90 top
R205 "Resistor" R_1206 623.5,467.5 r180 top
R206 "Resistor" R_1206 772.5,468.5 r0 top
R207 "Resistor" R_1206 772.5,461 r0 top
R208 "Resistor" R_1206 696.5,507.5 r90 top
R209 "Resistor" R_1206 705,426.5 r90 top
R210 "Resistor" R_1206 744,490 r0 top
R211 "Resistor" R_1206 685,416.5 r90 top
R212 "Resistor" R_1206 692.5,416.5 r90 top
R213 "Resistor" R_1206 744,482.5 r0 top
R214 "Resistor" R_1206 700,416.5 r90 top
R215 "Resistor" R_1206 744,475 r0 top
R216 "Resistor" R_1206 707.5,416.5 r90 top
R217 "Resistor" R_1206 744,467.5 r0 top
R218 "Resistor" R_1206 666.5,450 r180 top
R219 "Resistor" R_1206 715,416.5 r90 top
R220 "Resistor" R_1206 744,460 r0 top
R221 "Resistor" R_1206 722.5,416.5 r90 top
R222 "Resistor" R_1206 744,452.5 r0 top
R223 "Resistor" R_1206 730,416.5 r90 top
R224 "Resistor" R_1206 744,445 r0 top
R225 "Resistor" R_1206 690,436.5 r90 top
R226 "Resistor" R_1206 666,457.5 r180 top
R227 "Resistor" R_1206 697.5,436.5 r90 top
R228 "Resistor" R_1206 705,436 r90 top
R229 "Resistor" R_1206 733.5,452.5 r180 top
R230 "Resistor" R_1206 734,475 r0 top
R231 "Resistor" R_1206 623.5,475 r180 top
R232 "Resistor" R_1206 655,416.5 r270 top
R233 "Resistor" R_1206 697.5,426.5 r270 top
R234 "Resistor" R_1206 733.5,467.5 r180 top
R235 "Resistor" R_1206 733.5,460 r0 top
R236 "Resistor" R_1206 690,426.5 r270 top
R237 "Resistor" R_1206 670,426 r270 top
R238 "Resistor" R_1206 637.5,432.5 r180 top
R239 "Resistor" R_1206 624,482.5 r0 top
RX_CLK+ "InputArrow" ARROW 402.5,667.5 r90 top
RX_CLK- "InputArrow" ARROW 397.5,667.5 r90 top
RX_D0+ "InputArrow" ARROW 412.5,667.5 r90 top
RX_D0- "InputArrow" ARROW 407.5,667.5 r90 top
RX_D1+ "InputArrow" ARROW 422.5,667.5 r0 top
RX_D1- "InputArrow" ARROW 417.5,667.5 r90 top
RX_D2+ "InputArrow" ARROW 432.5,667.5 r90 top
RX_D2- "InputArrow" ARROW 427.5,667.5 r90 top
VD1 "DiodeSchottky" zener_diode 430,421 r90 top
VD2 "DiodeSchottky" zener_diode 437.5,420 r90 top
VD3 "BAV99" BAV99 410,537.5 r0 top
VD4 "DiodeSchottky" zener_diode 422.5,420 r90 top
VD5 "DiodeSchottky" zener_diode 500,432.5 r90 top
VD6 "BAV99" BAV99 417.5,537.5 r0 top
VD7 "DiodeSchottky" zener_diode 495,432.5 r270 top
VD8 "BAV99" BAV99 423.75,537.5 r0 top
VD9 "Diode" zener_diode 490,432.5 r90 top
VD10 "Diode" zener_diode 482.5,432.5 r90 top
VD11 "DiodeSchottky" zener_diode 477.5,432.5 r90 top
VD12 "DiodeSchottky" zener_diode 380,672.5 r90 top
VD13 "DiodeSchottky" zener_diode 375,672.5 r90 top
VD14 "DiodeSchottky" zener_diode 370,672.5 r90 top
VD15 "Diode" zener_diode 365,672.5 r270 top
VD16 "Diode" zener_diode 360,672.5 r270 top
VD17 "Diode" zener_diode 623.5,460 r180 top
VT1 "MMBT3904L" MMBT3904L 717.5,427.5 r270 top
VT2 "2N3906" 2N3906 615,478.9 r180 top
VT3 "MMBT3904L" MMBT3904L 682.5,427.5 r270 top
VT4 "2N3906" 2N3906 636.4,442.5 r90 top
X1 "FI-SE30P-HF" FI-SE30P-HF_v2 772.5,547.5 r180 top
X2 "DB-15" VGA 370.5,509 r90 top
ZQ1 "Crystal" crystal 642.5,497.44 r90 top

## Footprints (in the part's own frame and the unit in brackets; to place one, negate y for a bottom-side part, rotate by r counter-clockwise, add the part's x,y. Pads: shape width x height; smd on the part's side, far side on the other; paste and mask are expansions set on the pad)
2N3906 [mm]
  round 1 hole 0.6: 1(0,1.4) 2(0,0) 3(0,-1.4)
  silkscreen extent -2,-2.57 2.66,2.75
24Cxx [mm]
  rect 1x1 hole 0.6: 1(0,0)
  round 1 hole 0.6: 2(0,-2.54) 3(0,-5.08) 4(0,-7.62) 5(7.62,-7.62) 6(7.62,-5.08) 7(7.62,-2.54) 8(7.62,0)
  silkscreen extent 1.03,-8.89 6.58,1.27
74AHC1G14(SOT25) [mm]
  rect 0.6x0.5 smd: 1(0,0) 2(0,-0.95) 3(0,-1.9) 4(3,-1.9) 5(3,0)
  silkscreen extent 0.75,-2.38 2.25,0.47
74LCX125(page12) [mm]
  rect 2x0.7 smd: 1(0,0) 2(0,-1.27) 3(0,-2.54) 4(0,-3.81) 5(0,-5.08) 6(0,-6.35) 7(0,-7.62) 8(5.6,-7.62) 9(5.6,-6.35) 10(5.6,-5.08) 11(5.6,-3.81) 12(5.6,-2.54) 13(5.6,-1.27) 14(5.6,0)
  silkscreen extent 2.08,-8.26 3.52,0.64
74LV4053(SOT38-4) [mm]
  rect 1x1 hole 0.6: 1(0,0)
  round 1 hole 0.6: 2(0,-2.54) 3(0,-5.08) 4(0,-7.62) 5(0,-10.16) 6(0,-12.7) 7(0,-15.24) 8(0,-17.78) 9(7.62,-17.78) 10(7.62,-15.24) 11(7.62,-12.7) 12(7.62,-10.16) 13(7.62,-7.62) 14(7.62,-5.08) 15(7.62,-2.54) 16(7.62,0)
  silkscreen extent 1.22,-19.05 6.4,1.27
74LVX14(SO-14) [mm]
  rect 2x0.7 smd: 1(-0.085,0) 2(-0.085,-1.27) 3(-0.085,-2.54) 4(-0.085,-3.81) 5(-0.085,-5.08) 6(-0.085,-6.35) 7(-0.085,-7.62) 8(6.115,-7.62) 9(6.115,-6.35) 10(6.115,-5.08) 11(6.115,-3.81) 12(6.115,-2.54) 13(6.115,-1.27) 14(6.115,0)
  silkscreen extent 2,-8.26 4.03,0.64
AIC1732(SOT-89) [mm]
  rect 2x0.7 smd: 1(-2.675,1.5) 2(-2.675,0) 3(-2.675,-1.5) 4(2.25,0)
  silkscreen extent -0.91,-2.25 0.66,2.25
ARROW [mm]
  round 1 hole 0.6: 1(0,0)
AV9173-01(DIP8) [mm]
  rect 1x1 hole 0.6: 1(0,0)
  round 1 hole 0.6: 2(0,-2.54) 3(0,-5.08) 4(0,-7.62) 5(7.62,-7.62) 6(7.62,-5.08) 7(7.62,-2.54) 8(7.62,0)
  silkscreen extent 1.44,-8.89 6.19,1.27
BAV99 [mm]
  rect 0.5x0.6 smd: 1(-1.4,1) 2(-1.4,-1) 3(1.25,0)
  silkscreen extent -0.5,-1.5 0.5,1.5
cap_electro_13 [mm]
  round 1 hole 0.6: 1(-1.5,0) 2(1.5,0)
  silkscreen extent -2.7,-2.7 2.7,2.7
Cap_tantal_D [mm]
  rect 1.3x2.4 smd: 1(2.5,0) 2(-2.5,0)
  silkscreen extent -3.5,-1.7 3.5,1.7
crystal [mm]
  round 1 hole 0.6: 1(-2.44,0) 2(2.44,0)
  silkscreen extent -5.8,-2.6 5.8,2.6
FI-SE30P-HF_v2 [mm]
  rect 1.2x1.2 hole 0.8: 1(0,0)
  round 1.2 hole 0.8: 2(0,-2.5) 3(0,-5) 4(0,-7.5) 5(0,-10) 6(0,-12.5) 7(0,-15) 8(0,-17.5) 9(0,-20) 10(0,-22.5) 11(0,-25) 12(0,-27.5) 13(0,-30) 14(0,-32.5) 15(0,-35) 16(0,-37.5) 17(0,-40) 18(0,-42.5) 19(0,-45) 20(0,-47.5) 21(0,-50) 22(0,-52.5) 23(0,-55) 24(0,-57.5) 25(0,-60) 26(0,-62.5) 27(0,-65) 28(0,-67.5) 29(0,-70) 30(0,-72.5)
  silkscreen extent -2.25,-73.75 2.25,1.25
inductor [mm]
  rect 2.5x4.5 smd: 1(-3,0) 2(3,0)
  silkscreen extent -5,-3 5,3.25
MMBT3904L [mm]
  rect 0.9x0.8 smd: 1(-1.25,0) 2(-1.25,-2.5) 3(3,-1.25)
  silkscreen extent -0.19,-3.25 2.08,0.65
R_1206 [mm]
  rect 1x1.6 smd: 1(-1.5,0) 2(1.5,0)
  silkscreen extent -2.25,-1.1 2.25,1.1
SD1210 [mm]
  rect 2x0.35 smd: 1(0,0) 2(0,-0.65) 3(0,-1.3) 4(0,-1.95) 5(0,-2.6) 6(0,-3.25) 7(0,-3.9) 8(0,-4.55) 9(0,-5.2) 10(0,-5.85) 11(0,-6.5) 12(0,-7.15) 13(0,-7.8) 14(0,-8.45) 15(0,-9.1) 16(0,-9.75) 17(0,-10.4) 18(0,-11.05) 19(0,-11.7) 20(0,-12.35) 21(0,-13) 22(0,-13.65) 23(0,-14.3) 24(0,-14.95) 25(0,-15.6) 26(0,-16.25) 27(0,-16.9) 28(0,-17.55) 29(0,-18.2) 30(0,-18.85) 31(0,-19.5) 32(0,-20.15) 33(0,-20.8) 34(0,-21.45) 35(0,-22.1) 36(0,-22.75) 37(0,-23.4) 38(0,-24.05) 39(0,-24.7) 40(0,-25.35) 81(34.45,-25.6) 82(34.45,-24.95) 83(34.45,-24.3) 84(34.45,-23.65) 85(34.45,-23) 86(34.45,-22.35) 87(34.45,-21.7) 88(34.45,-21.05) 89(34.45,-20.4) 90(34.45,-19.75) 91(34.45,-19.1) 92(34.45,-18.45) 93(34.45,-17.8) 94(34.45,-17.15) 95(34.45,-16.5) 96(34.45,-15.85) 97(34.45,-15.2) 98(34.45,-14.55) 99(34.45,-13.9) 100(34.45,-13.25) 101(34.45,-12.6) 102(34.45,-11.95) 103(34.45,-11.3) 104(34.45,-10.65) 105(34.45,-10) 106(34.45,-9.35) 107(34.45,-8.7) 108(34.45,-8.05) 109(34.45,-7.4) 110(34.45,-6.75) 111(34.45,-6.1) 112(34.45,-5.45) 113(34.45,-4.8) 114(34.45,-4.15) 115(34.45,-3.5) 116(34.45,-2.85) 117(34.45,-2.2) 118(34.45,-1.55) 119(34.45,-0.9) 120(34.45,-0.25)
  rect 0.35x2 smd: 41(4.55,-30.15) 42(5.2,-30.15) 43(5.85,-30.15) 44(6.5,-30.15) 45(7.15,-30.15) 46(7.8,-30.15) 47(8.45,-30.15) 48(9.1,-30.15) 49(9.75,-30.15) 50(10.4,-30.15) 51(11.05,-30.15) 52(11.7,-30.15) 53(12.35,-30.15) 54(13,-30.15) 55(13.65,-30.15) 56(14.3,-30.15) 57(14.95,-30.15) 58(15.6,-30.15) 59(16.25,-30.15) 60(16.9,-30.15) 61(17.55,-30.15) 62(18.2,-30.15) 63(18.85,-30.15) 64(19.5,-30.15) 65(20.15,-30.15) 66(20.8,-30.15) 67(21.45,-30.15) 68(22.1,-30.15) 69(22.75,-30.15) 70(23.4,-30.15) 71(24.05,-30.15) 72(24.7,-30.15) 73(25.35,-30.15) 74(26,-30.15) 75(26.65,-30.15) 76(27.3,-30.15) 77(27.95,-30.15) 78(28.6,-30.15) 79(29.25,-30.15) 80(29.9,-30.15) 121(29.9,4.3) 122(29.25,4.3) 123(28.6,4.3) 124(27.95,4.3) 125(27.3,4.3) 126(26.65,4.3) 127(26,4.3) 128(25.35,4.3) 129(24.7,4.3) 130(24.05,4.3) 131(23.4,4.3) 132(22.75,4.3) 133(22.1,4.3) 134(21.45,4.3) 135(20.8,4.3) 136(20.15,4.3) 137(19.5,4.3) 138(18.85,4.3) 139(18.2,4.3) 140(17.55,4.3) 141(16.9,4.3) 142(16.25,4.3) 143(15.6,4.3) 144(14.95,4.3) 145(14.3,4.3) 146(13.65,4.3) 147(13,4.3) 148(12.35,4.3) 149(11.7,4.3) 150(11.05,4.3) 151(10.4,4.3) 152(9.75,4.3) 153(9.1,4.3) 154(8.45,4.3) 155(7.8,4.3) 156(7.15,4.3) 157(6.5,4.3) 158(5.85,4.3) 159(5.2,4.3) 160(4.55,4.3)
  silkscreen extent 1.68,-28.47 32.77,2.62
SIL151 [mm]
  rect 2x0.35 smd: 1(0,0) 2(0,0.65) 3(0,1.3) 4(0,1.95) 5(0,2.6) 6(0,3.25) 7(0,3.9) 8(0,4.55) 9(0,5.2) 10(0,5.85) 11(0,6.5) 12(0,7.15) 13(0,7.8) 14(0,8.45) 15(0,9.1) 16(0,9.75) 17(0,10.4) 18(0,11.05) 19(0,11.7) 20(0,12.35) 21(0,13) 22(0,13.65) 23(0,14.3) 24(0,14.95) 25(0,15.6) 51(-24.7,15.6) 52(-24.7,14.95) 53(-24.7,14.3) 54(-24.7,13.65) 55(-24.7,13) 56(-24.7,12.35) 57(-24.7,11.7) 58(-24.7,11.05) 59(-24.7,10.4) 60(-24.7,9.75) 61(-24.7,9.1) 62(-24.7,8.45) 63(-24.7,7.8) 64(-24.7,7.15) 65(-24.7,6.5) 66(-24.7,5.85) 67(-24.7,5.2) 68(-24.7,4.55) 69(-24.7,3.9) 70(-24.7,3.25) 71(-24.7,2.6) 72(-24.7,1.95) 73(-24.7,1.3) 74(-24.7,0.65) 75(-24.7,0)
  rect 0.35x2 smd: 26(-4.55,20.15) 27(-5.2,20.15) 28(-5.85,20.15) 29(-6.5,20.15) 30(-7.15,20.15) 31(-7.8,20.15) 32(-8.45,20.15) 33(-9.1,20.15) 34(-9.75,20.15) 35(-10.4,20.15) 36(-11.05,20.15) 37(-11.7,20.15) 38(-12.35,20.15) 39(-13,20.15) 40(-13.65,20.15) 41(-14.3,20.15) 42(-14.95,20.15) 43(-15.6,20.15) 44(-16.25,20.15) 45(-16.9,20.15) 46(-17.55,20.15) 47(-18.2,20.15) 48(-18.85,20.15) 49(-19.5,20.15) 50(-20.15,20.15) 76(-20.15,-4.55) 77(-19.5,-4.55) 78(-18.85,-4.55) 79(-18.2,-4.55) 80(-17.55,-4.55) 81(-16.9,-4.55) 82(-16.25,-4.55) 83(-15.6,-4.55) 84(-14.95,-4.55) 85(-14.3,-4.55) 86(-13.65,-4.55) 87(-13,-4.55) 88(-12.35,-4.55) 89(-11.7,-4.55) 90(-11.05,-4.55) 91(-10.4,-4.55) 92(-9.75,-4.55) 93(-9.1,-4.55) 94(-8.45,-4.55) 95(-7.8,-4.55) 96(-7.15,-4.55) 97(-6.5,-4.55) 98(-5.85,-4.55) 99(-5.2,-4.55) 100(-4.55,-4.55)
  silkscreen extent -23.02,-2.86 -1.69,18.47
SM0230 [mm]
  rect 2x0.35 smd: 1(0.75,0) 2(0.75,0.65) 3(0.75,1.3) 4(0.75,1.95) 5(0.75,2.6) 6(0.75,3.25) 7(0.75,3.9) 8(0.75,4.55) 9(0.75,5.2) 10(0.75,5.85) 21(-14.2,5.85) 22(-14.2,5.2) 23(-14.2,4.55) 24(-14.2,3.9) 25(-14.2,3.25) 26(-14.2,2.6) 27(-14.2,1.95) 28(-14.2,1.3) 29(-14.2,0.65) 30(-14.2,0)
  rect 0.35x2 smd: 11(-3.8,10.4) 12(-4.45,10.4) 13(-5.1,10.4) 14(-5.75,10.4) 15(-6.4,10.4) 16(-7.05,10.4) 17(-7.7,10.4) 18(-8.35,10.4) 19(-9,10.4) 20(-9.65,10.4) 31(-9.65,-4.55) 32(-9,-4.55) 33(-8.35,-4.55) 34(-7.7,-4.55) 35(-7.05,-4.55) 36(-6.4,-4.55) 37(-5.75,-4.55) 38(-5.1,-4.55) 39(-4.45,-4.55) 40(-3.8,-4.55)
  silkscreen extent -12.52,-2.87 -0.94,8.72
SN75LVDS83_v2 [mm]
  rect 1x1 hole 0.6: 1(0,0)
  round 1 hole 0.6: 2(0,-2.5) 3(0,-5) 4(0,-7.5) 5(0,-10) 6(0,-12.5) 7(0,-15) 8(0,-17.5) 9(0,-20) 10(0,-22.5) 11(0,-25) 12(0,-27.5) 13(0,-30) 14(0,-32.5) 15(0,-35) 16(0,-37.5) 17(0,-40) 18(0,-42.5) 19(0,-45) 20(0,-47.5) 21(0,-50) 22(0,-52.5) 23(0,-55) 24(0,-57.5) 25(0,-60) 26(0,-62.5) 27(0,-65) 28(0,-67.5) 29(15.2,-67.5) 30(15.2,-65) 31(15.2,-62.5) 32(15.2,-60) 33(15.2,-57.5) 34(15.2,-55) 35(15.2,-52.5) 36(15.2,-50) 37(15.2,-47.5) 38(15.2,-45) 39(15.2,-42.5) 40(15.2,-40) 41(15.2,-37.5) 42(15.2,-35) 43(15.2,-32.5) 44(15.2,-30) 45(15.2,-27.5) 46(15.2,-25) 47(15.2,-22.5) 48(15.2,-20) 49(15.2,-17.5) 50(15.2,-15) 51(15.2,-12.5) 52(15.2,-10) 53(15.2,-7.5) 54(15.2,-5) 55(15.2,-2.5) 56(15.2,0)
  silkscreen extent 2.08,-68.75 13.11,1.25
ST_80_2_ADI [mil]
  rect 57.56x16.97 smd paste+0 mask+0: 1(-304,243.11) 2(-304,217.52) 3(-304,191.93) 4(-304,166.34) 5(-304,140.75) 6(-304,115.16) 7(-304,89.57) 8(-304,63.98) 9(-304,38.39) 10(-304,12.8) 11(-304,-12.8) 12(-304,-38.39) 13(-304,-63.98) 14(-304,-89.57) 15(-304,-115.16) 16(-304,-140.75) 17(-304,-166.34) 18(-304,-191.93) 19(-304,-217.52) 20(-304,-243.11) 41(304,-243.11) 42(304,-217.52) 43(304,-191.93) 44(304,-166.34) 45(304,-140.75) 46(304,-115.16) 47(304,-89.57) 48(304,-63.98) 49(304,-38.39) 50(304,-12.8) 51(304,12.8) 52(304,38.39) 53(304,63.98) 54(304,89.57) 55(304,115.16) 56(304,140.75) 57(304,166.34) 58(304,191.93) 59(304,217.52) 60(304,243.11)
  rect 16.97x57.56 smd paste+0 mask+0: 21(-243.11,-304) 22(-217.52,-304) 23(-191.93,-304) 24(-166.34,-304) 25(-140.75,-304) 26(-115.16,-304) 27(-89.57,-304) 28(-63.98,-304) 29(-38.39,-304) 30(-12.79,-304) 31(12.8,-304) 32(38.39,-304) 33(63.98,-304) 34(89.57,-304) 35(115.16,-304) 36(140.75,-304) 37(166.34,-304) 38(191.93,-304) 39(217.52,-304) 40(243.11,-304) 61(243.11,304) 62(217.52,304) 63(191.93,304) 64(166.34,304) 65(140.75,304) 66(115.16,304) 67(89.57,304) 68(63.98,304) 69(38.39,304) 70(12.8,304) 71(-12.79,304) 72(-38.39,304) 73(-63.98,304) 74(-89.57,304) 75(-115.16,304) 76(-140.75,304) 77(-166.34,304) 78(-191.93,304) 79(-217.52,304) 80(-243.11,304)
  silkscreen extent -353,-353 353,353
VGA [mm]
  round 1.2 hole 0.7: 1(-5,2) 2(-3,2) 3(-1,2) 4(1,2) 5(3,2) 6(-4,0) 7(-2,0) 8(0,0) 9(2,0) 10(4,0) 11(-5,-2) 12(-3,-2) 13(-1,-2) 14(1,-2) 15(3,-2)
  round 2.5 hole 2: 16(8,0) 17(-9,0)
  silkscreen extent -11,-7 10,4
zener_diode [mm]
  rect 0.4x0.7 smd: 1(-1.6,0) 2(1.5,0)
  silkscreen extent -2,-0.9 1.9,0.9

## Part data
DD10: library part 74AHC1G14-TA
X2: library part VGA_connector
DD4: Built_By=EMA_UL_Team, Copyright="Copyright (C) 2018 Accelerated Designs. All rights reserved", Manufacturer_Part_Number=AD9883ABSTZ-140, RefDes=RefDes, SourceLibrary=Analog_2012-01-01_6, Type=DEV, Vendor="Analog Devices Inc"

## Free pads (board coordinates)
  round 4 hole 4 unplated: 1(357.5,415) 1(357.5,700) 1(772.5,415) 1(772.5,700)

## Via types
v1: diameter 1, hole 0.9, Top Layer to Bottom Layer, 847 vias

## Nets (pads, with @x,y where several pads share a name; then routed paths per layer and width w, separated by ;. In a path a pad name is that pad's centre, name@x,y a point inside that pad or via, vN(x,y) a via of type N, cw(c..) or ccw(c..) an arc to the next point about the centre after c; other vN are vias at no path point)
3_3Va: L13.1 L14.1 L15.1 L18.1 | length 74.9
  Top Layer w0.25: L18.1@437.5,683 443.275,683 445.033,684.759 481.584,684.759 483.311,683.031 483.311,678.129 484.94,676.5 ; L15.1@467.5,676.5 472.237,676.5 472.737,677 L14.1@477.5,677 482.244,677 482.744,676.5 484.94,676.5 ; L13.1@487.5,676.5 484.94,676.5
3V3: C62.2 C171.1 DD1.14 DD8.8 DD15.14 DD17.2 DD17.8 L1.2 L7.2 L12.2 R110.1 R111.1 R181.2 R182.2 R187.2 R188.2 R202.2 R203.2 R210.1 R211.1 R212.1 R213.1 R214.1 R215.1 R216.1 R217.1 R219.1 R220.1 R221.1 R222.1 R223.1 R224.1 R225.1 R226.2 R227.1 R228.1 R229.1 R230.1 R238.2 R239.2 VT2.2 VT4.2 | length 1200.1
  Top Layer w0.25: L12.2@389.5,435 389.5,434.975 L12.2@388.417,434.975 ; L7.2@389.5,485 L7.2@389.5,483.616 ; v1(402.717,619.125) 390,606.408 L1.2@390,550 390,547.692 391.579,546.113 391.579,514.421 388.417,511.259 388.417,502.107 391.084,499.44 391.084,483.87 390.83,483.616 L7.2@389.5,483.616 ; DD1.14@429.96,436.2 429.96,449.337 428.65,450.647 411.836,450.647 403.614,442.425 394.425,442.425 393.344,443.506 393.344,469.189 392.151,470.383 390.144,470.383 388.417,468.655 L12.2@388.417,434.975 ; R110.1@605,648.5 R110.1@605.46,648.5 ; R111.1@612.5,648.58 608.766,648.58 608.686,648.5 R110.1@605.46,648.5 ; v1(632.601,496.291) 632.622,496.27 DD15.14@635.6,496.27 ; DD17.2@644.88,484.88 627.88,484.88 R239.2@625.5,482.5 625.5,480.568 623.832,478.9 VT2.2@615,478.9 615,479.4 612.521,479.4 611.353,480.568 611.353,533.146 612.623,534.416 613.41,534.416 613.918,534.924 613.918,567.03 603.936,577.012 603.936,590.372 604.266,590.702 604.266,593.293 606.882,595.909 606.882,609.905 607.492,610.514 607.492,614.172 605.46,616.204 v1(605.46,638.556) R110.1@605.46,648.5 ; DD17.8@652.5,487.42 650,484.92 C171.1@650,469.88 652.62,472.5 R182.2@665,472.5 R181.2@665,465 665,461.485 664.5,460.985 R226.2@664.5,457.5 664.5,453.74 656.631,445.872 639.772,445.872 VT4.2@636.4,442.5 636,442.1 R238.2@636,432.5 636,428.285 650.494,413.791 684.53,413.791 685,414.261 R211.1@685,415 R212.1@692.5,415 R214.1@700,415 705.724,415 ; R187.2@682.5,498 689.135,498 ; v1(687.883,491.896) 687.883,496.748 689.135,498 ; R225.1@690,435 R227.1@697.5,435 700.989,435 701.489,434.5 R228.1@705,434.5 705,432.717 706.145,431.571 706.145,422.123 705.18,421.157 705.18,415.544 705.724,415 ; R203.2@705,498 R202.2@697.5,498 R188.2@690,498 689.135,498 ; R230.1@732.5,475 733.638,473.862 741.362,473.862 R215.1@742.5,475 ; R224.1@742.5,445 R222.1@742.5,452.5 ; R210.1@742.5,490 R213.1@742.5,482.5 R215.1@742.5,475 ; L12.2@388.417,434.975 387.909,434.975 387.909,480.517 389.5,482.108 L7.2@389.5,483.616 ; 705.724,415 R216.1@707.5,415 R219.1@715,415 R221.1@722.5,415 R223.1@730,415 733.755,415 735,416.245 R229.1@735,452.5 R222.1@742.5,452.5 ; R222.1@742.5,452.5 R220.1@742.5,460 R217.1@742.5,467.5 R215.1@742.5,475
  Bottom Layer w0.25: v1(402.717,619.125) 429.983,619.125 430.86,620.003 431.673,621.132 431.673,622.859 432.384,623.57 495.808,623.57 505.892,633.654 518.614,633.654 DD8.8@520,635.04 523.04,635.04 C62.2@527.5,639.5 527.5,638.861 542.442,638.861 547.395,633.908 600.812,633.908 v1(605.46,638.556) ; v1(632.601,496.291) 632.601,492.213 639.934,484.88 DD17.2@644.88,484.88 643.992,485.768 643.992,488.213 644.398,488.62 651.3,488.62 DD17.8@652.5,487.42 656.976,491.896 v1(687.883,491.896)
3V3b: C134.1 L19.1 L21.1 L22.1 L23.1 | length 52.9
  Top Layer w0.25: L19.1@543,662.5 543,664.489 537,670.489 L21.1@537,672.5 537,674.497 543,680.497 L22.1@543,682.5 ; L23.1@543,692.5 L22.1@543,682.5 ; C134.1@560,682.5 556.791,682.5 555.701,683.59 548.282,683.59 547.192,682.5 L22.1@543,682.5
3V3LVDSA: C136.1 C139.2 C142.2 C145.2 C148.2 DD13.44 DD14.44 L22.2 | length 381.1
  Top Layer w0.25: L22.2@537,682.5 537,679.635 v1(537.007,679.628) ; v1(562.811,679.628) 565.683,682.5 ; C136.1@567.5,682.5 565.683,682.5 ; C142.2@590,692.5 588.267,694.233 563.448,694.233 562.127,692.912 562.127,686.285 565.683,682.5 ; C148.2@605,692.5 v1(626.788,670.712) ; DD13.44@755.2,542.5 756.082,543.382 756.082,574.065 753.796,576.351 753.796,658.596 DD14.44@755.2,660
  Bottom Layer w0.25: v1(537.007,679.628) v1(562.811,679.628) ; C139.2@582.5,692.5 C142.2@590,692.5 C145.2@597.5,692.5 C148.2@605,692.5 ; v1(626.788,670.712) 718.871,670.712 725.7,663.883 751.317,663.883 DD14.44@755.2,660
3V3LVDSD: C135.1 C138.2 C141.2 C144.2 C147.2 C150.2 C151.2 C152.2 C153.2 C154.2 C155.2 C156.2 C157.2 DD13.1 DD13.9 DD13.26 DD14.1 DD14.9 DD14.26 L21.2 R177.2 R179.2 | length 446.2
  Top Layer w0.25: R177.2@540,651 539.015,651 538.759,651.256 538.759,658.368 540.309,659.917 544.576,659.917 544.576,667.233 543,668.809 L21.2@543,672.5 543,674.802 v1(545.337,677.139) ; R179.2@563.5,692.5 563.5,691.692 572.692,682.5 C135.1@575,682.5 582.5,682.5 C138.2@585,680 ; DD13.26@740,510 738.607,511.393 738.607,551.107 DD13.9@740,552.5 741.383,553.883 741.383,571.117 DD13.1@740,572.5 739.115,573.385 739.115,626.615 DD14.26@740,627.5 739.115,628.385 739.115,669.115 DD14.9@740,670 741.383,671.383 741.383,688.617 DD14.1@740,690
  Bottom Layer w0.25: v1(545.337,677.139) 582.139,677.139 C138.2@585,680 592,680 C141.2@592.5,680.5 593,680 C144.2@600,680 C147.2@607.5,680 C150.2@615,680 C151.2@622.5,680 C152.2@630,680 C153.2@637.5,680 638,680.5 C154.2@645,680.5 C155.2@652,680.5 C156.2@660,680.5 C157.2@667.5,680.5 708.004,680.5 717.465,689.961 739.961,689.961 DD14.1@740,690
3V3LVDSP: C137.1 C140.2 C143.2 C146.2 C149.2 DD13.34 DD14.34 L23.2 | length 392.3
  Top Layer w0.25: v1(537,689.635) L23.2@537,692.5 ; v1(550.673,682.5) C137.1@552.5,682.5 ; C140.2@637.5,690 640.004,687.496 640.004,674.903 v1(645.744,669.163) ; DD13.34@755.2,517.5 756.082,518.382 756.082,532.892 755.447,533.527 754.888,533.527 754.321,534.094 754.321,538.091 754.634,538.404 754.939,538.404 756.59,540.055 756.59,578.637 756.082,579.145 756.082,634.118 DD14.34@755.2,635
  Bottom Layer w0.25: v1(537,689.635) 544.135,682.5 v1(550.673,682.5) 552.449,684.276 609.276,684.276 C149.2@615,690 C146.2@622.5,690 C143.2@630,690 C140.2@637.5,690 ; v1(645.744,669.163) 710.87,669.163 716.654,663.379 740.454,663.379 740.893,662.94 740.893,662.127 739.648,660.883 739.394,660.883 739.115,660.603 739.115,658.927 739.648,658.393 740.893,658.393 751.84,647.446 751.84,644.754 752.856,643.738 755.472,643.738 756.082,643.128 756.082,635.882 DD14.34@755.2,635
3V3SD: C64.1 C65.2 C66.2 C67.2 C68.2 C69.2 C71.2 C73.2 C75.2 C77.2 C81.2 C85.2 C89.2 C94.2 C98.2 DD9.17 DD9.36 DD9.45 DD9.46 DD9.56 DD9.67 DD9.77 DD9.91 DD9.92 DD9.99 DD9.109 DD9.119 DD9.129 DD9.141 DD9.150 DD9.160 L19.2 | length 529.2
  Top Layer w0.25: L19.2@537,662.5 537,659.619 v1(537.007,659.613) ; C64.1@552.5,692.5 552.5,693.953 553.72,695.173 589.356,695.173 594.004,690.524 594.004,674.504 C69.2@587.5,668 ; DD9.36@601.8,594.9 604.171,594.9 606.28,597.009 ; DD9.17@601.8,607.25 605.047,607.25 606.28,606.017 606.28,597.009 ; v1(605.104,595.401) 606.28,596.577 606.28,597.009 ; DD9.160@606.35,621.95 v1(606.35,623.875) ; DD9.46@609.6,587.5 DD9.45@608.95,587.5 608.95,594.37 ; DD9.150@612.85,621.95 v1(612.85,625.067) ; DD9.56@616.1,587.5 616.1,593.113 ; v1(618.388,595.401) 616.1,593.113 ; DD9.141@618.7,621.95 v1(618.7,620.323) 618.7,614.778 608.95,605.028 608.95,594.37 ; v1(623.24,589.128) 623.25,589.117 DD9.67@623.25,587.5 ; v1(623.849,595.401) 624.264,595.401 627.949,591.716 ; v1(626.5,620.323) DD9.129@626.5,621.95 ; DD9.77@629.75,587.5 v1(629.75,589.915) 627.949,591.716 ; DD9.99@636.25,603.75 640.224,603.75 641.096,602.878 641.096,599.567 639.201,597.672 638.682,597.672 637.804,598.55 DD9.91@636.25,598.55 DD9.92@636.25,599.2 634.478,599.2 634.365,599.313 632.864,599.313 629.707,602.47 629.707,609.651 629.412,609.946 628.294,609.946 627.949,609.6 627.949,591.716 ; DD9.109@636.25,610.25 638.723,610.25 v1(642.214,613.74) ; DD9.119@636.25,616.75 v1@637.591,616.75 ; C77.2@637.5,668 636.102,666.602 636.102,653.761 637.591,652.272 v1@637.591,616.75 ; v1(637.87,616.75) v1@637.591,616.75 ; 608.95,594.37 610.616,596.036 614.68,596.036 616.1,594.616 616.1,593.113
  Bottom Layer w0.25: v1(537.007,659.613) 549.113,659.613 C66.2@557.5,668 567,668 C67.2@567.5,668.5 568,668 C65.2@577.5,668 C69.2@587.5,668 C68.2@597.5,668 C71.2@607.5,668 C73.2@617.5,668 618,667.5 C75.2@627.5,667.5 628,668 C77.2@637.5,668 638,667.5 C81.2@647.5,667.5 648,668 C85.2@657.5,668 C89.2@667.5,668 668,667.5 C94.2@675,667.5 675.5,668 C98.2@682.5,668 ; v1(605.104,595.401) v1(618.388,595.401) v1(623.849,595.401) ; v1(606.35,623.875) 607.311,623.875 608.505,622.681 611.954,622.681 612.85,623.577 v1(612.85,625.067) 613.258,625.475 625.856,625.475 626.5,624.831 v1@626.5,620.579 ; v1(618.7,620.323) 619.585,621.208 625.615,621.208 v1(626.5,620.323) v1@626.5,620.579 ; v1(623.24,589.128) 624.129,588.239 629.056,588.239 629.75,588.932 v1(629.75,589.915) ; v1(642.214,613.74) 640.88,613.74 v1(637.87,616.75) 642.112,620.992 642.112,624.141 641.45,624.803 630.724,624.803 v1@626.5,620.579
5V_DDC: R50.2 R51.2 VD15.1 | length 26.1
  Top Layer w0.25: R51.2@364,685 364,689.018 ; R50.2@364,690 364,689.018 ; VD15.1@365,674.1 361.509,674.1 360.096,675.513 360.096,685.978 363.136,689.018 364,689.018
5V_STBY: C6.1 C9.1 C35.1 C36.1 C169.1 DD2.2 DD2.4 DD5.2 DD5.4 R1.2 R206.1 R207.1 R209.1 R236.2 VD9.1 VD16.1 | length 821.1
  Top Layer w0.25: v1(357.759,551.612) 357.759,672.592 359.267,674.1 VD16.1@360,674.1 ; v1(439.293,542.544) v1(439.293,551.612) ; v1(486.5,515.967) R1.2@486.5,520 ; VD9.1@490,430.9 489.345,430.9 488.213,429.768 488.213,425.888 DD5.2@487.5,425.175 DD5.4@487.5,420.25 DD2.4@497.5,420.25 DD2.2@497.5,425.175 497.805,423.621 502.869,423.621 ; v1(508.533,425.907) 508.025,425.907 505.739,423.621 502.869,423.621 ; C36.1@521,530 520,529 C9.1@520,510 523.545,506.455 523.545,448.305 523.24,448 C6.1@522,448 518.038,448 516.941,449.097 509.783,449.097 508.686,448 C35.1@505.5,448 503.682,448 502.869,447.187 502.869,423.621 ; R236.2@690,425 694.207,425 695.154,424.053 700.753,424.053 ; v1(702.97,422.605) 702.97,423.882 704.088,425 ; v1(702.97,424.053) 700.753,424.053 ; R209.1@705,425 704.088,425 ; C169.1@760.5,447.5 771,458 R207.1@771,461 R206.1@771,468.5 ; 700.753,424.053 701.7,425 704.088,425
  Bottom Layer w0.25: v1(357.759,551.612) v1(439.293,551.612) ; v1(439.293,542.544) 439.674,542.925 508.075,542.925 C36.1@521,530 ; v1(486.5,515.967) 491.571,510.896 519.104,510.896 C9.1@520,510 ; v1(508.533,425.907) 508.711,425.729 664.642,425.729 665.023,425.348 673.481,425.348 675.665,423.164 702.081,423.164 v1(702.97,424.053) ; v1(702.97,422.605) 735.605,422.605 C169.1@760.5,447.5